# Altium PCB PCB1.PcbDoc
Units mm, origin at the board's own origin, x right, y up, seen from the top; angles counter-clockwise.
Board outline 46.7 x 16.4 mm, 2 copper layers (Top Layer, Bottom Layer); 22 components, 12 nets, 56 pads, 11 vias.
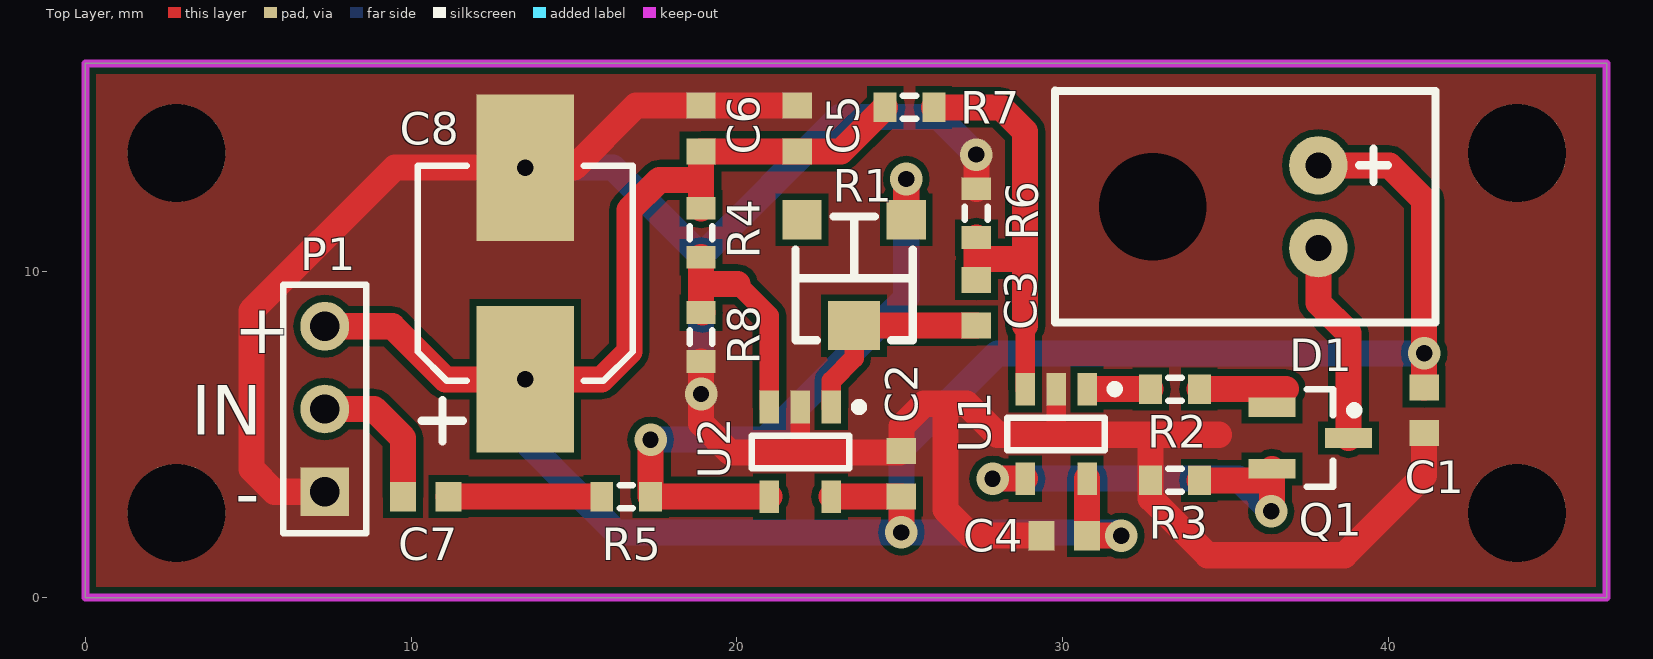
[diagram p0: Top Layer view]
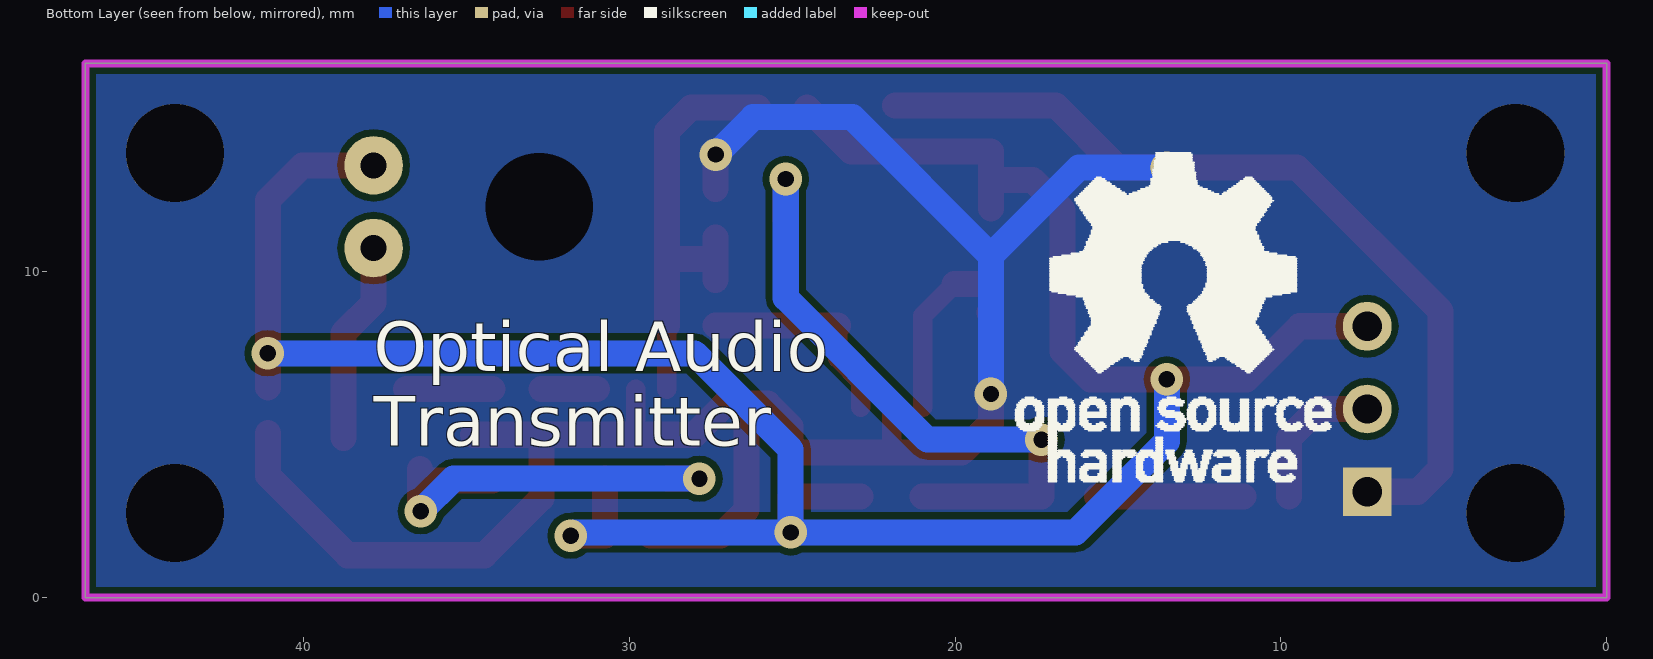
[diagram p1: Bottom Layer view, seen from below]

## Layer stack, top to bottom
Top Solder: solder mask 0.0102, Solder Resist, Dk 3.5
Top Layer: signal copper 0.0356
Dielectric 1: dielectric 0.32, FR-4, Dk 4.8
Bottom Layer: signal copper 0.0356
Bottom Solder: solder mask 0.0102, Solder Resist, Dk 3.5

## Board outline
0,0 46.7,0 46.7,16.4 0,16.4

## Design rules (kind name [scope] priority, off if disabled: settings)
Clearance [All] p1: gap=0.203
DiffPairsRouting [All] p1: maxlimit=2.54 minlimit=0.203 mostfreqgap=0.381 toplayer_minwidth=0.203 toplayer_maxwidth=2.54 toplayer_prefwidth=0.381 bottomlayer_minwidth=0.203 bottomlayer_maxwidth=2.54 bottomlayer_prefwidth=0.381 maxuncoupledlength=12.7
PlaneConnect [All] p1: planeconnectstyle=Direct reliefexpansion=0.508 reliefentries=4 reliefconductorwidth=0.254 reliefairgap=0.254
PolygonConnect [All] p1: connectstyle=Direct reliefconductorwidth=0.254 reliefentries=4 polygonreliefangle="90 Angle" airgapwidth=0.254
RoomDefinition Sheet1 [InComponentClass('Sheet1')] p1: confinementstyle=ConfineIn formatcopy=TRUE lockcomponents=FALSE outline 0,0 46.7,0 46.7,16.4 0,16.4
RoutingVias [All] p1: holewidth=0.3 width=0.6 viastyle="Through Hole" minholewidth=0.3 minwidth=0.6 maxholewidth=0.3 maxwidth=0.6
SolderMaskExpansion [All] p1: expansion=0.102
Width [All] p1: maxlimit=2.54 minlimit=0.203 preferedwidth=0.381
28 further rules are at their usual default settings.

## Components (designator, comment, footprint, x,y, rotation, side; value= is the part's Value field where it differs from the comment)
C1 "0603" 1608[0603] 41.1,5.75 r270 top
C2 "0603" 1608[0603] 25.05,3.8 r90 top
C3 "0603" 1608[0603] 27.35,9.05 r270 top
C4 "0603" 1608[0603] 30.05,1.9 r0 top
C5 "0603" 1608[0603] 21.85,14.4 r90 top
C6 "0603" 1608[0603] 18.9,14.4 r270 top
C7 "0603" 1608[0603] 10.45,3.1 r0 top
C8 "EDK106M050A9GAA" EDK106M050A9GAA 13.5,6.7 r90 top
D1 "IFE96" IFE96 41.45,12 r270 top
P1 "INPUT" HDR1X3 7.35,3.25 r90 top
Q1 "FDV303N" SOT23_M 37.6,4.9 r0 top
R1 "TC33X-2-104E" TC33X-2-104E 23.6,9.8 r180 top
R2 "0603" J1-0603 33.45,6.4 r0 top
R3 "0603" J1-0603 33.45,3.6 r180 top
R4 "0603" J1-0603 18.9,11.2 r270 top
R5 "0603" J1-0603 16.6,3.1 r180 top
R6 "0603" J1-0603 27.35,11.8 r90 top
R7 "0603" J1-0603 25.3,15.05 r180 top
R8 "0603" J1-0603 18.9,8 r90 top
U1 "MAX4322" MAX4322_SOT23-5 30.75,6.4 r270 top
U2 "MAX4322" MAX4322_SOT23-5 22.9,5.85 r270 top
? "Comment" "OpenSourceLOGO small" 13.2,8.7 r180 bottom

## Footprints (in the part's own frame and the unit in brackets; to place one, negate y for a bottom-side part, rotate by r counter-clockwise, add the part's x,y. Pads: shape width x height; smd on the part's side, far side on the other; paste and mask are expansions set on the pad)
1608[0603] [mm] "Chip Capacitor, Body 1.6x0.8mm, IPC High Density"
  rect 0.8x0.9 smd: 1(-0.7,0) 2(0.7,0)
  body extent -0.87,-0.48 0.87,0.48, height 1.3
EDK106M050A9GAA [mm] "Aluminum Electrolytic Capacitor, Body 6,60x6,60x5,40mm, IPC Low Density"
  rect 4.5x3 smd: 1(0,0) 2(6.5,0)
  silkscreen extent -1.91,-3.3 6.55,3.3, body extent -0.05,-3.3 6.55,3.3, height 5.4
HDR1X3 [mm] "Connector; Header; 3 Position"
  rect 1.5x1.5 hole 0.9: 1(0,0)
  round 1.5 hole 0.9: 2(2.54,0) 3(5.08,0)
  silkscreen extent -1.27,-1.27 6.35,1.27
IFE96 [mm]
  round 0 hole 3.3: 0(0,-8.68)
  round 1.8 hole 0.8: 1(1.27,-3.6) 2(-1.27,-3.6)
  silkscreen extent -3.56,-11.68 3.55,0
J1-0603 [mm] "Chip Resistor, Body 1.6x0.8mm, IPC High Density"
  rect 0.7x0.9 smd: 1(-0.75,0) 2(0.75,0)
  silkscreen extent -0.2,-0.35 0.2,0.35, body extent -0.85,-0.48 0.85,0.48, height 0.9
MAX4322_SOT23-5 [mm] "SOT23, 5-Leads, Body 2,90x2,80mm, Pitch 0,95mm, IPC Medium Density"
  rect 1x0.6 smd: 1(0,0) 2(0,-0.95) 3(0,-1.9) 4(2.75,-1.9) 5(2.75,0)
  silkscreen extent -0.12,-2.45 1.88,0.98, body extent 0.5,-2.45 2.25,0.55, height 1.45
"OpenSourceLOGO small" [mm]
  silkscreen extent -4.95,-5.15 4.75,4.96
SOT23_M [mm] "SOT23, 3-Leads, Body 2.9x1.3mm, Pitch 0.95mm, Lead Span 2.3mm - Reverse Pinning, IPC Low Density"
  rect 1.45x0.6 smd: 1(-1.175,0.95) 2(1.175,0) 3(-1.175,-0.95)
  silkscreen extent -0.1,-1.5 1.48,1.5, body extent -0.7,-1.5 0.7,1.5, height 1.1
TC33X-2-104E [mm]
  rect 1.2x1.2 smd: 1(-1.6,-1.8) 3(1.6,-1.8)
  rect 1.6x1.5 smd: 2(0,1.45)
  silkscreen extent -1.8,-1.9 1.8,1.9

## Part data
C1 C2 C3 C4 C5 C6 C7: library part Cap, "Capacitor"
C8: library part "Cap Pol1", "Polarized Capacitor (Radial)"
P1: library part "Header 3", "Header, 3-Pin"
R1: "Potentiometer"
R2 R3 R4 R5 R6 R7 R8: library part Res2, "Resistor"

## Free pads (board coordinates)
  round 3 hole 3: 2(2.8,2.6) 2(2.8,13.65) 2(43.95,2.6) 2(43.95,13.65)

## Via types
v1: diameter 1, hole 0.5, Top Layer to Bottom Layer, 11 vias

## Nets (pads, with @x,y where several pads share a name; then routed paths per layer and width w, separated by ;. In a path a pad name is that pad's centre, name@x,y a point inside that pad or via, vN(x,y) a via of type N, cw(c..) or ccw(c..) an arc to the next point about the centre after c; other vN are vias at no path point)
GND: C1.2 C2.2 C4.1 C5.2 C6.1 C8.2 D1.0 P1.1 pad.2 R3.2 R6.2 R8.1 U1.2 U2.2 | length 91.6
  Top Layer w0.6: 21.95,4.45 U2.2 ; 29.8,5.05 U1.2
  Top Layer w0.8: P1.1 5.8,3.25 5.1,3.95 5.1,8.8 9.5,13.2 v1(13.5,13.2) 15,13.2 16.9,15.1 C6.1 C5.2 ; R8.1 v1(18.9,6.25) 18.9,5.35 19.8,4.45 21.95,4.45 25,4.45 C2.2 25.05,5.25 25.75,5.95 26.4,5.95 ; R6.2 v1(27.35,13.6) ; C4.1 27.2,1.9 26.4,2.7 26.4,5.95 ; 34.8,5 32.7,5 ; C1.2 41.1,3.75 38.65,1.3 34.45,1.3 32.7,3.05 R3.2 32.7,5 ; 26.4,5.95 27.05,5.95 28,5 32.7,5
  Bottom Layer w0.8: v1(13.5,13.2) 16.2,13.2 18.9,10.5 ; v1(18.9,6.25) 18.9,10.5 ; v1(27.35,13.6) 26.2,14.75 23.15,14.75 18.9,10.5
NetC3_1: C3.1 R6.1 R7.1 U1.3 | length 13.8
  Top Layer w0.6: U1.3 28.85,8.35
  Top Layer w0.8: R7.1 28.1,15.05 28.85,14.3 28.85,10.4 ; C3.1 27.35,10.4 ; R6.1 27.35,10.4 ; 28.85,8.35 28.85,10.4 ; 27.35,10.4 28.85,10.4
NetC3_2: C3.2 R1.2 U2.1 | length 6.5
  Top Layer w0.6: U2.1 22.9,6.65 23.6,7.35 R1.2
  Top Layer w0.8: R1.2 C3.2
NetC7_1: C7.1 P1.2 | length 4.6
  Top Layer w0.8: P1.2 8.86,5.79 9.75,4.9 C7.1
NetC7_2: C7.2 R5.2 | length 4.5
  Top Layer w0.8: C7.2 R5.2@15.65,3.1
NetD1_1: D1.1 Q1.2 | length 6.2
  Top Layer w0.8: D1.1 37.85,9.05 38.775,8.125 Q1.2
NetQ1_1: Q1.1 R2.2 | length 2.6
  Top Layer w0.8: R2.2 36.85,6.4
NetQ1_3: Q1.3 R3.1 U1.4 | length 13.5
  Top Layer w0.8: v1(27.85,3.65) U1.4 ; R3.1 36.425,3.6 ; v1(36.4,2.65) 36.425,2.675 36.425,3.6 ; Q1.3 36.425,3.6
  Bottom Layer w0.8: v1(27.85,3.65) 35.4,3.65 v1(36.4,2.65)
NetR1_1: R1.1 R5.1 U2.4 | length 20
  Top Layer w0.8: v1(17.35,4.85) R5.1 U2.4 ; R1.1 v1(25.2,12.85)
  Bottom Layer w0.8: v1(17.35,4.85) 20.85,4.85 25.2,9.2 v1(25.2,12.85)
NetR2_1: R2.1 U1.1 | length 1.7
  Top Layer w0.8: U1.1@31,6.4 R2.1
NetR4_2: R4.2 R8.2 U2.3 | length 7
  Top Layer w0.6: 20.025,9.625 21,8.65 U2.3
  Top Layer w0.8: R4.2 18.9,9.625 ; R8.2@18.95,8.75 18.9,8.8 18.9,9.625 ; 20.025,9.625 18.9,9.625
VCC: C1.1 C2.1 C4.2 C5.1 C6.2 C8.1 D1.2 P1.3 R4.1 R7.2 U1.5 U2.5 | length 82
  Top Layer w0.8: P1.3 9.42,8.33 11.05,6.7 v1(13.5,6.7) 15.85,6.7 16.7,7.55 16.7,11.9 17.625,12.825 18.9,12.825 ; R4.1 18.9,12.825 ; U2.5 C2.1 v1(25.05,2) ; R7.2 23.2,13.7 C5.1 C6.2 18.9,12.825 ; U1.5 C4.2 v1(31.8,1.9) ; D1.2 40.03,13.27 41.1,12.2 v1(41.1,7.5) C1.1
  Bottom Layer w0.8: v1(13.5,6.7) 13.5,4.8 16.3,2 v1(25.05,2) ; v1(31.8,1.9) 31.7,2 v1(25.05,2) ; v1(41.1,7.5) 28,7.5 25.05,4.55 v1(25.05,2)
pads on no net: R1.3

## Polygon pours and split planes (outlines as drawn)
GND on Top Layer "topGND" (solid, pour order 0): 0,0 46.7,0 46.7,16.4 0,16.4
GND on Bottom Layer "bottomGND" (solid, pour order 1): 0,0 46.7,0 46.7,16.4 0,16.4

## Keep-outs
Keep-Out Layer:
  the board outline again, w0.25

## Silkscreen, mask and mechanical layers (free items; w line width, h text height)
Top Overlay:
  text "+" at 4.55,7.5 h1.52
  text "IN" at 3.25,5 h1.52
  text "-" at 4.6,2.45 h1.52
Bottom Overlay:
  text "Optical Audio / Transmitter" at 37.847,4.666 h1.52